# Altium PCB KeyboardMain.PcbDoc
Units mm, origin at the board's own origin, x right, y up, seen from the top; angles counter-clockwise.
Board outline 214 x 233 mm, 2 copper layers (Top Layer, Bottom Layer); 164 components, 120 nets, 562 pads, 51 vias.
Unrouted connection lines stored in the file: 1.
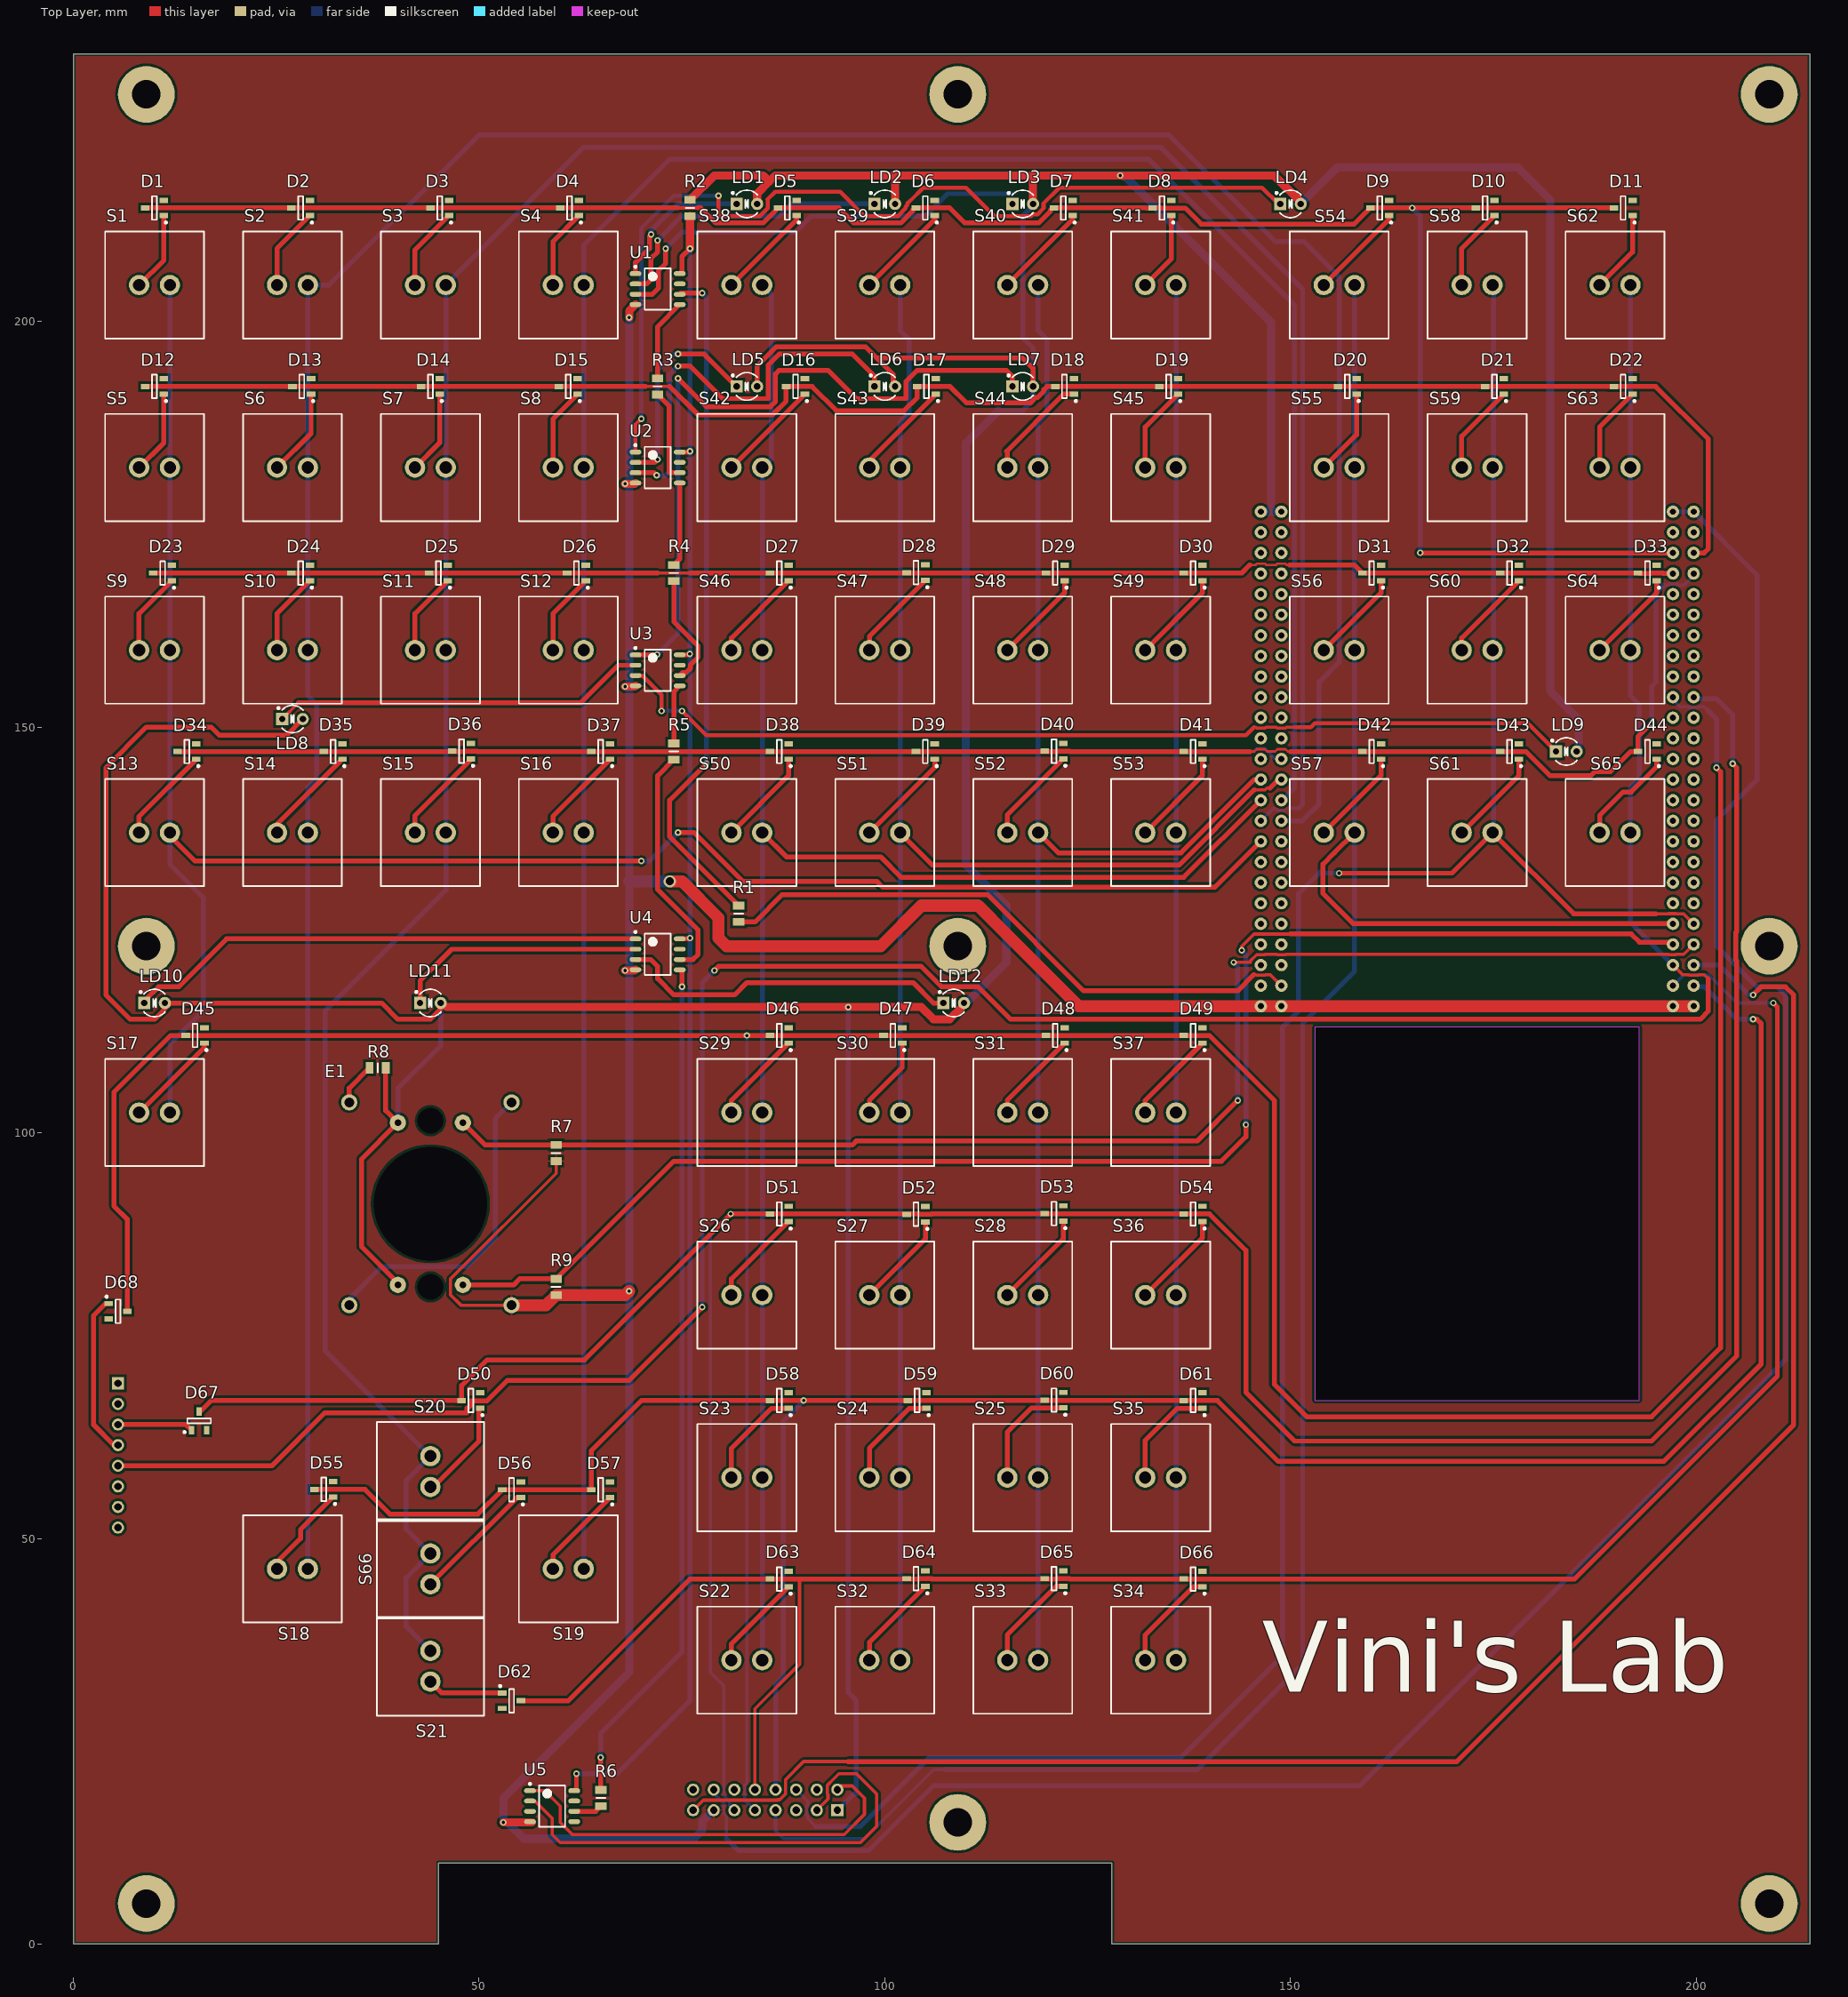
[diagram p0: Top Layer view]
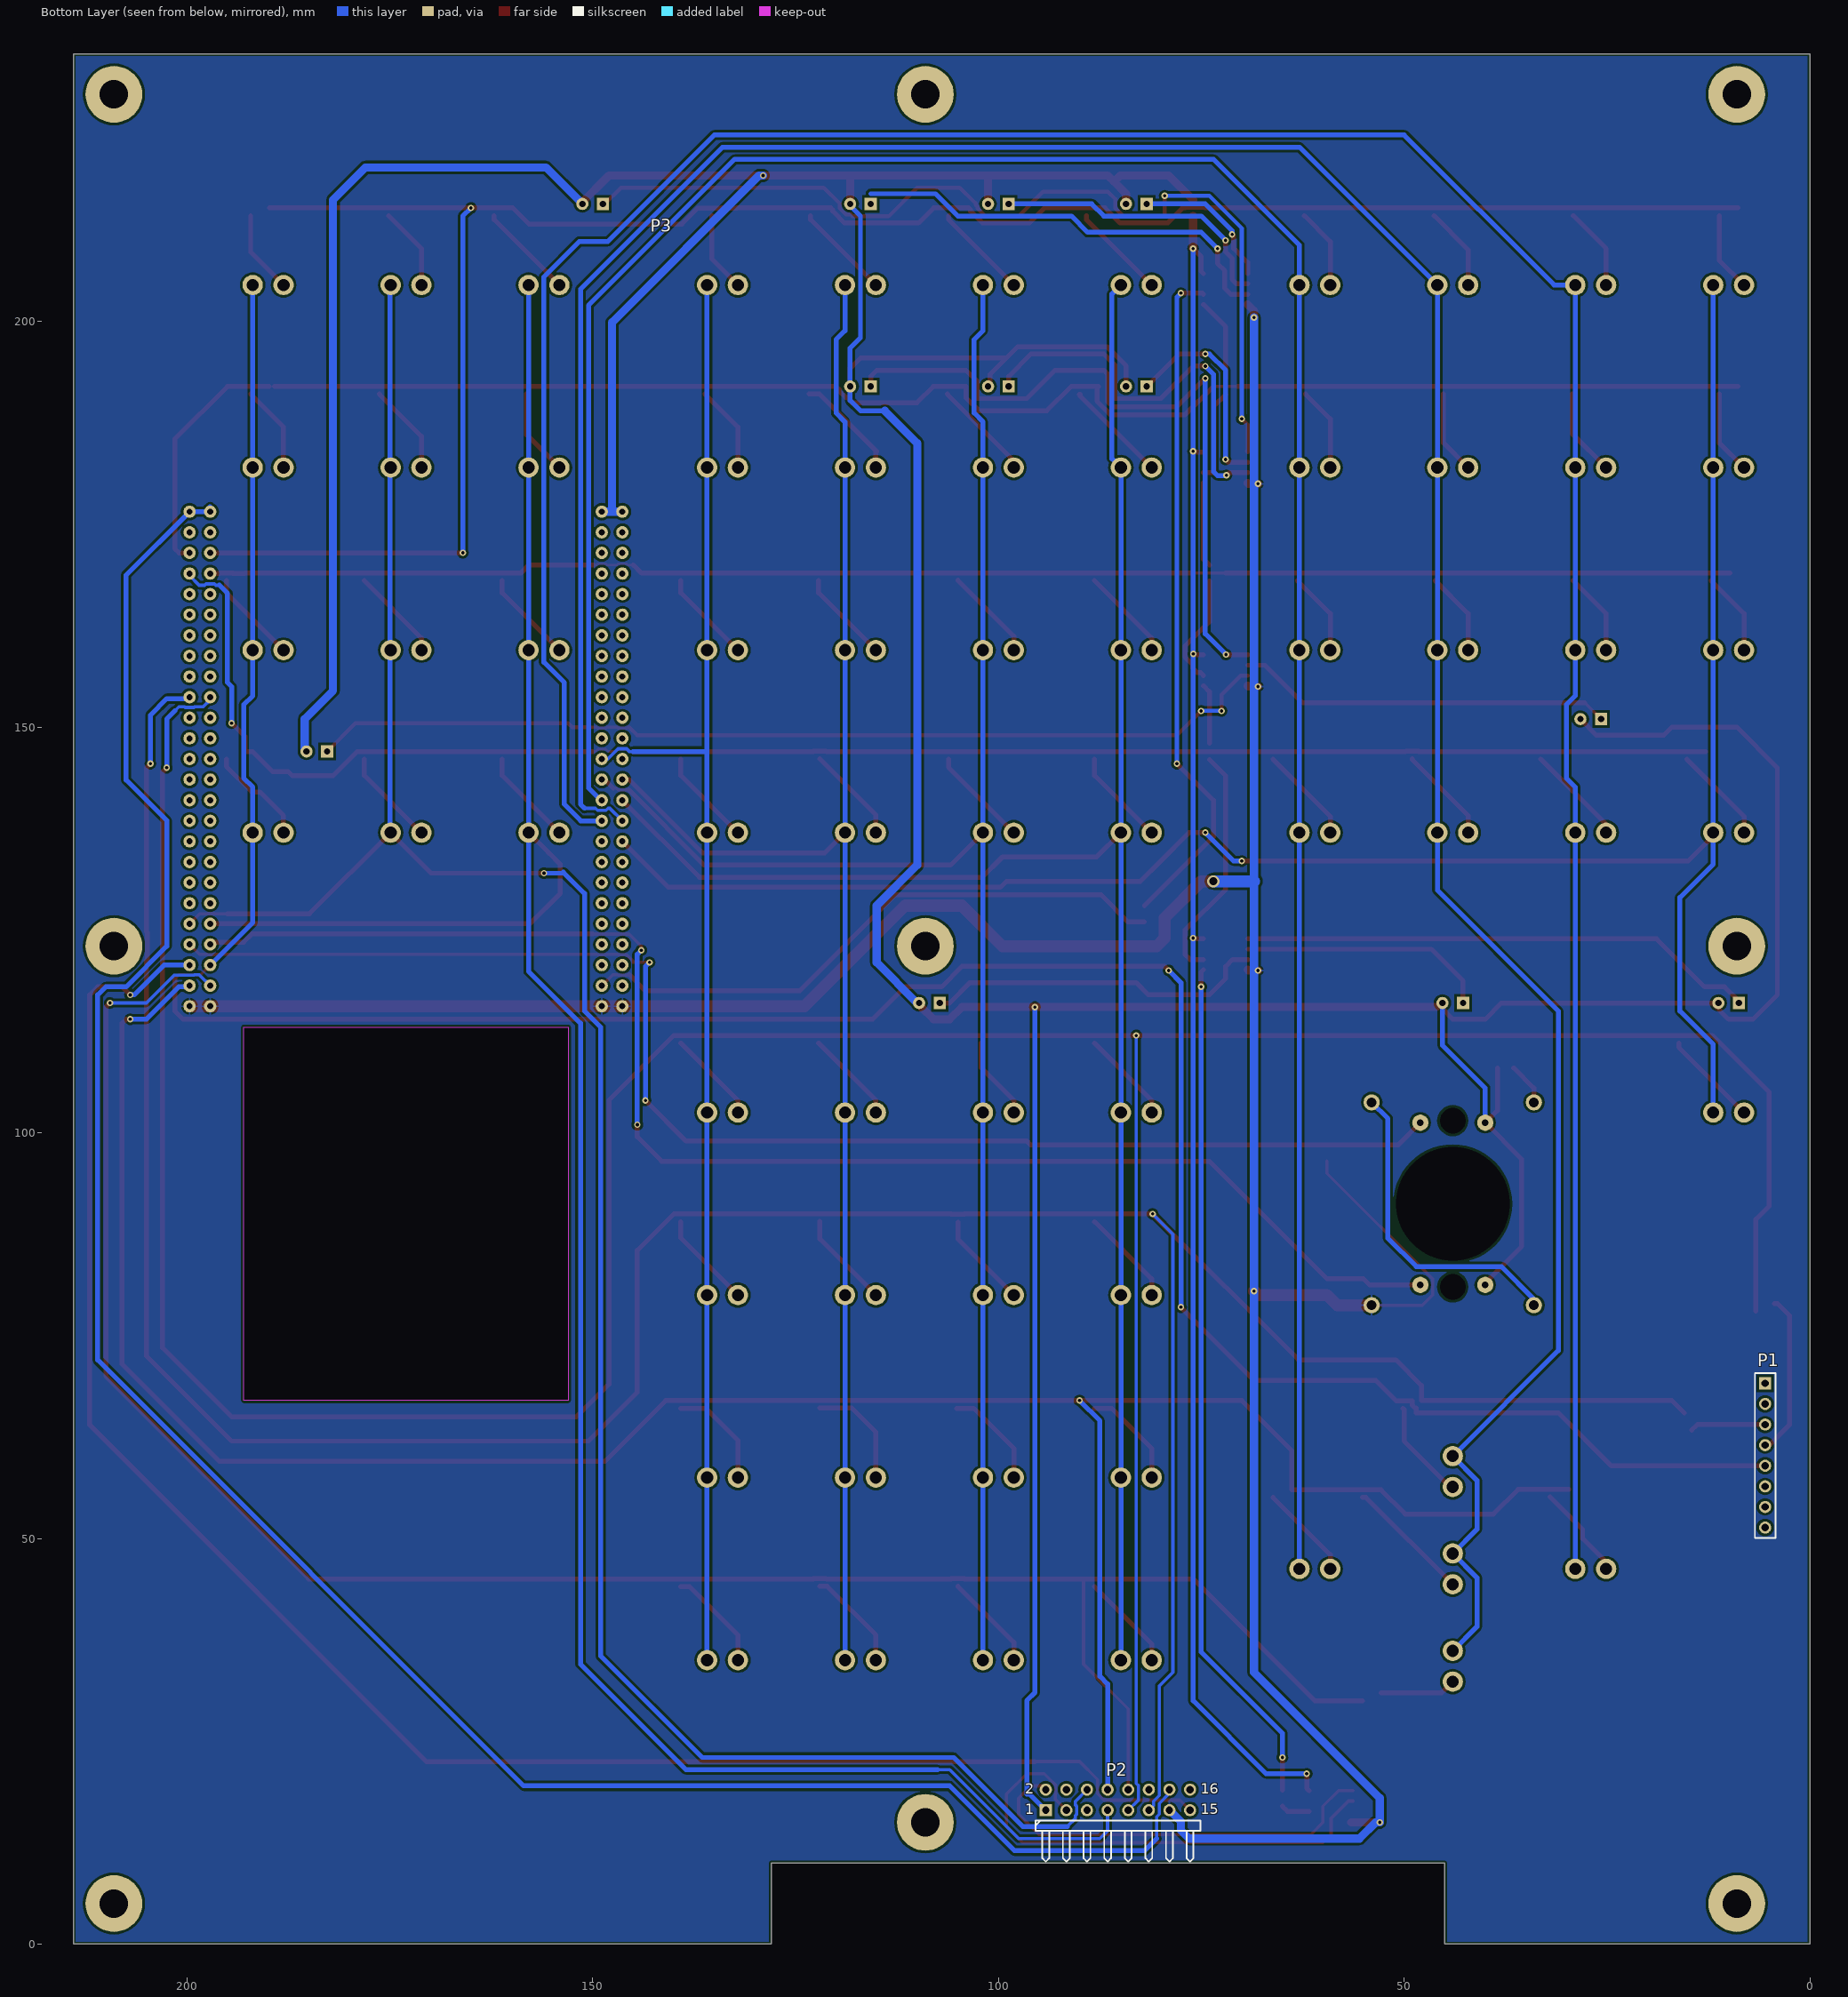
[diagram p1: Bottom Layer view, seen from below]
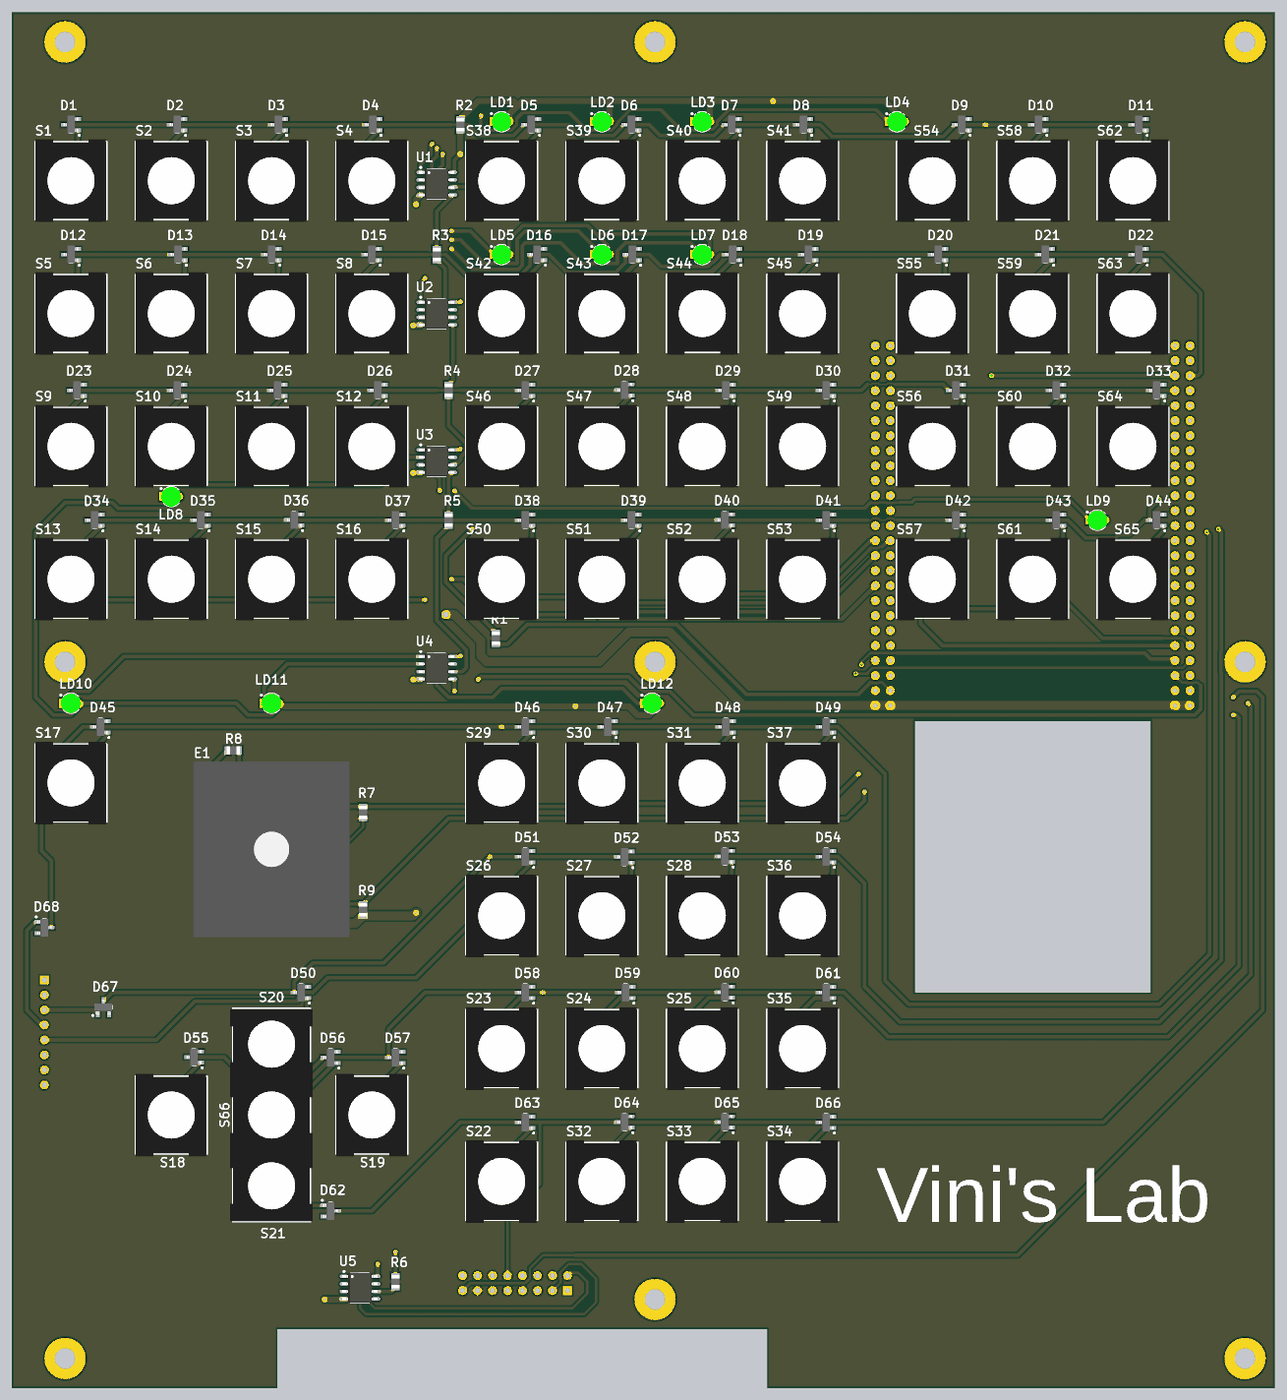
[diagram p2: 3D render of the assembled board from above, using the file's embedded part models]

## Layer stack, top to bottom
Top Solder: solder mask 0.0102, Solder Resist, Dk 3.5
Top Layer: signal copper 0.0356
Dielectric 1: dielectric 0.32, FR-4, Dk 4.8
Bottom Layer: signal copper 0.0356
Bottom Solder: solder mask 0.0102, Solder Resist, Dk 3.5

## Board outline
0,0 0,233 214,233 214,0 128,0 128,10 45,10 45,0
cut-out: 193,113 153,113 153,67 193,67

## Design rules (kind name [scope] priority, off if disabled: settings)
BoardOutlineClearance [All] p1: gap=0.3 ignorepadtopadclearanceinfootprint=FALSE
Clearance [All] p1: gap=0.3 ignorepadtopadclearanceinfootprint=FALSE
PolygonConnect [All] p1: connectstyle=Relief reliefconductorwidth=0.254 reliefentries=4 polygonreliefangle="90 Angle" airgapwidth=0.254
RoutingVias [All] p1: holewidth=0.7 width=1 viastyle="Through Hole" minholewidth=0.3 minwidth=0.6 maxholewidth=2 maxwidth=2
SolderMaskExpansion [All] p1: expansion=0.102 istentingtop=FALSE
Width [All] p1: maxlimit=4 minlimit=0.3 preferedwidth=0.4
30 further rules are at their usual default settings.

## Classes and differential pairs
component class KeyboardMainMCU: P3

## Components (designator, comment, footprint, x,y, rotation, side; value= is the part's Value field where it differs from the comment)
D1 "BAV199" SOT95P240X110-3N 10,214 r180 top
D2 "BAV199" SOT95P240X110-3N 28,214 r180 top
D3 "BAV199" SOT95P240X110-3N 45.15,214 r180 top
D4 "BAV199" SOT95P240X110-3N 61.15,214 r180 top
D5 "BAV199" SOT95P240X110-3N 88,214 r180 top
D6 "BAV199" SOT95P240X110-3N 105,214 r180 top
D7 "BAV199" SOT95P240X110-3N 122,214 r180 top
D8 "BAV199" SOT95P240X110-3N 134.15,214 r180 top
D9 "BAV199" SOT95P240X110-3N 161,214 r180 top
D10 "BAV199" SOT95P240X110-3N 174,214 r180 top
D11 "BAV199" SOT95P240X110-3N 191,214 r180 top
D12 "BAV199" SOT95P240X110-3N 10,192 r180 top
D13 "BAV199" SOT95P240X110-3N 28.15,192 r180 top
D14 "BAV199" SOT95P240X110-3N 44,192 r180 top
D15 "BAV199" SOT95P240X110-3N 61,192 r180 top
D16 "BAV199" SOT95P240X110-3N 89,192 r180 top
D17 "BAV199" SOT95P240X110-3N 105.15,192 r180 top
D18 "BAV199" SOT95P240X110-3N 122.15,192 r180 top
D19 "BAV199" SOT95P240X110-3N 135,192 r180 top
D20 "BAV199" SOT95P240X110-3N 157,192 r180 top
D21 "BAV199" SOT95P240X110-3N 175.15,192 r180 top
D22 "BAV199" SOT95P240X110-3N 191,192 r180 top
D23 "BAV199" SOT95P240X110-3N 11,169 r180 top
D24 "BAV199" SOT95P240X110-3N 28,169 r180 top
D25 "BAV199" SOT95P240X110-3N 45,169 r180 top
D26 "BAV199" SOT95P240X110-3N 62,169 r180 top
D27 "BAV199" SOT95P240X110-3N 87,169 r180 top
D28 "BAV199" SOT95P240X110-3N 103.85,169.05 r180 top
D29 "BAV199" SOT95P240X110-3N 121,169 r180 top
D30 "BAV199" SOT95P240X110-3N 138,169 r180 top
D31 "BAV199" SOT95P240X110-3N 160,169 r180 top
D32 "BAV199" SOT95P240X110-3N 177,169 r180 top
D33 "BAV199" SOT95P240X110-3N 194,169 r180 top
D34 "BAV199" SOT95P240X110-3N 14,147 r180 top
D35 "BAV199" SOT95P240X110-3N 32,147 r180 top
D36 "BAV199" SOT95P240X110-3N 47.85,147.05 r180 top
D37 "BAV199" SOT95P240X110-3N 65,147 r180 top
D38 "BAV199" SOT95P240X110-3N 87,147 r180 top
D39 "BAV199" SOT95P240X110-3N 105,147 r180 top
D40 "BAV199" SOT95P240X110-3N 120.85,147.05 r180 top
D41 "BAV199" SOT95P240X110-3N 138,147 r180 top
D42 "BAV199" SOT95P240X110-3N 160,147 r180 top
D43 "BAV199" SOT95P240X110-3N 177,147 r180 top
D44 "BAV199" SOT95P240X110-3N 194,147 r180 top
D45 "BAV199" SOT95P240X110-3N 15,112 r180 top
D46 "BAV199" SOT95P240X110-3N 87,112 r180 top
D47 "BAV199" SOT95P240X110-3N 101,112 r180 top
D48 "BAV199" SOT95P240X110-3N 121,112 r180 top
D49 "BAV199" SOT95P240X110-3N 138,112 r180 top
D50 "BAV199" SOT95P240X110-3N 49,67 r180 top
D51 "BAV199" SOT95P240X110-3N 87,90 r180 top
D52 "BAV199" SOT95P240X110-3N 103.85,89.95 r180 top
D53 "BAV199" SOT95P240X110-3N 120.85,90.05 r180 top
D54 "BAV199" SOT95P240X110-3N 138,90 r180 top
D55 "BAV199" SOT95P240X110-3N 30.85,56.05 r180 top
D56 "BAV199" SOT95P240X110-3N 54,56 r180 top
D57 "BAV199" SOT95P240X110-3N 65,56 r180 top
D58 "BAV199" SOT95P240X110-3N 87,67 r180 top
D59 "BAV199" SOT95P240X110-3N 104,67 r180 top
D60 "BAV199" SOT95P240X110-3N 120.85,67.05 r180 top
D61 "BAV199" SOT95P240X110-3N 138,67 r180 top
D62 "BAV199" SOT95P240X110-3N 54,30 r0 top
D63 "BAV199" SOT95P240X110-3N 87,45 r180 top
D64 "BAV199" SOT95P240X110-3N 103.85,45.05 r180 top
D65 "BAV199" SOT95P240X110-3N 120.85,45.05 r180 top
D66 "BAV199" SOT95P240X110-3N 138,45 r180 top
D67 "BAV199" SOT95P240X110-3N 15.5,64.5 r90 top
D68 "BAV199" SOT95P240X110-3N 5.5,78 r0 top
E1 "ENCODER" ENCODER 44,91.25 r0 top
LD1 "Green" LED_3MM_GREEN_1C-2A 83,214.5 r0 top
LD2 "Green" LED_3MM_GREEN_1C-2A 100,214.5 r0 top
LD3 "Green" LED_3MM_GREEN_1C-2A 117,214.5 r0 top
LD4 "Green" LED_3MM_GREEN_1C-2A 150,214.5 r0 top
LD5 "Green" LED_3MM_GREEN_1C-2A 83,192 r0 top
LD6 "Green" LED_3MM_GREEN_1C-2A 100,192 r0 top
LD7 "Green" LED_3MM_GREEN_1C-2A 117,192 r0 top
LD8 "Green" LED_3MM_GREEN_1C-2A 27,151 r0 top
LD9 "Green" LED_3MM_GREEN_1C-2A 184,147 r0 top
LD10 "Green" LED_3MM_GREEN_1C-2A 10,116 r0 top
LD11 "Green" LED_3MM_GREEN_1C-2A 44,116 r0 top
LD12 "Green" LED_3MM_GREEN_1C-2A 108.5,116 r0 top
P1 "Header 8" HDR1X8 5.5,69.12 r270 bottom
P2 "Header 8X2H" HDR2X8H 94.16,16.5 r180 bottom
P3 "STM32DISCOVERY" DISCO 206.3,113.06 r180 bottom locked
R1 "33" RESC2012X60N 82,127 r270 top
R2 "100k" RESC2012X60N 76,214 r90 top
R3 "33" RESC2012X60N 72,192 r90 top
R4 "33" RESC2012X60N 74,169 r90 top
R5 "33" RESC2012X60N 74,147 r90 top
R6 "33" RESC2012X60N 65,18 r90 top
R7 "22k" RESC2012X60N 59.5,97.5 r270 top
R8 "49R9" RESC2012X60N 37.5,108 r180 top
R9 "22k" RESC2012X60N 59.5,81 r90 top
S1 "SWITCH" SWITCH 10,204.5 r0 top
S2 "SWITCH" SWITCH 27,204.5 r0 top
S3 "SWITCH" SWITCH 44,204.5 r0 top
S4 "SWITCH" SWITCH 61,204.5 r0 top
S5 "SWITCH" SWITCH 10,182 r0 top
S6 "SWITCH" SWITCH 27,182 r0 top
S7 "SWITCH" SWITCH 44,182 r0 top
S8 "SWITCH" SWITCH 61,182 r0 top
S9 "SWITCH" SWITCH 10,159.5 r0 top
S10 "SWITCH" SWITCH 27,159.5 r0 top
S11 "SWITCH" SWITCH 44,159.5 r0 top
S12 "SWITCH" SWITCH 61,159.5 r0 top
S13 "SWITCH" SWITCH 10,137 r0 top
S14 "SWITCH" SWITCH 27,137 r0 top
S15 "SWITCH" SWITCH 44,137 r0 top
S16 "SWITCH" SWITCH 61,137 r0 top
S17 "SWITCH" SWITCH 10,102.5 r0 top
S18 "SWITCH" SWITCH 27,46.25 r0 top
S19 "SWITCH" SWITCH 61,46.25 r0 top
S20 "SWITCH" SWITCH 44,58.25 r90 top
S21 "SWITCH" SWITCH 44,34.25 r90 top
S22 "SWITCH" SWITCH 83,35 r0 top
S23 "SWITCH" SWITCH 83,57.5 r0 top
S24 "SWITCH" SWITCH 100,57.5 r0 top
S25 "SWITCH" SWITCH 117,57.5 r0 top
S26 "SWITCH" SWITCH 83,80 r0 top
S27 "SWITCH" SWITCH 100,80 r0 top
S28 "SWITCH" SWITCH 117,80 r0 top
S29 "SWITCH" SWITCH 83,102.5 r0 top
S30 "SWITCH" SWITCH 100,102.5 r0 top
S31 "SWITCH" SWITCH 117,102.5 r0 top
S32 "SWITCH" SWITCH 100,35 r0 top
S33 "SWITCH" SWITCH 117,35 r0 top
S34 "SWITCH" SWITCH 134,35 r0 top
S35 "SWITCH" SWITCH 134,57.5 r0 top
S36 "SWITCH" SWITCH 134,80 r0 top
S37 "SWITCH" SWITCH 134,102.5 r0 top
S38 "SWITCH" SWITCH 83,204.5 r0 top
S39 "SWITCH" SWITCH 100,204.5 r0 top
S40 "SWITCH" SWITCH 117,204.5 r0 top
S41 "SWITCH" SWITCH 134,204.5 r0 top
S42 "SWITCH" SWITCH 83,182 r0 top
S43 "SWITCH" SWITCH 100,182 r0 top
S44 "SWITCH" SWITCH 117,182 r0 top
S45 "SWITCH" SWITCH 134,182 r0 top
S46 "SWITCH" SWITCH 83,159.5 r0 top
S47 "SWITCH" SWITCH 100,159.5 r0 top
S48 "SWITCH" SWITCH 117,159.5 r0 top
S49 "SWITCH" SWITCH 134,159.5 r0 top
S50 "SWITCH" SWITCH 83,137 r0 top
S51 "SWITCH" SWITCH 100,137 r0 top
S52 "SWITCH" SWITCH 117,137 r0 top
S53 "SWITCH" SWITCH 134,137 r0 top
S54 "SWITCH" SWITCH 156,204.5 r0 top
S55 "SWITCH" SWITCH 156,182 r0 top
S56 "SWITCH" SWITCH 156,159.5 r0 top
S57 "SWITCH" SWITCH 156,137 r0 top
S58 "SWITCH" SWITCH 173,204.5 r0 top
S59 "SWITCH" SWITCH 173,182 r0 top
S60 "SWITCH" SWITCH 173,159.5 r0 top
S61 "SWITCH" SWITCH 173,137 r0 top
S62 "SWITCH" SWITCH 190,204.5 r0 top
S63 "SWITCH" SWITCH 190,182 r0 top
S64 "SWITCH" SWITCH 190,159.5 r0 top
S65 "SWITCH" SWITCH 190,137 r0 top
S66 "SWITCH" SWITCH 44,46.25 r90 top
U1 "WS2811" SOP-8 72,204 r0 top
U2 "WS2811" SOP-8 72,182 r0 top
U3 "WS2811" SOP-8 72,157 r0 top
U4 "WS2811" SOP-8 72,122 r0 top
U5 "WS2811" SOP-8 59,17 r0 top

## Footprints (in the part's own frame and the unit in brackets; to place one, negate y for a bottom-side part, rotate by r counter-clockwise, add the part's x,y. Pads: shape width x height; smd on the part's side, far side on the other; paste and mask are expansions set on the pad)
DISCO [mil]
  round 60 hole 30: 1(260.63,2500) 2(360.63,2500) 3(260.63,2400) 4(360.63,2400) 5(260.63,2300) 6(360.63,2300) 7(260.63,2200) 8(360.63,2200) 9(260.63,2100) 10(360.63,2100) 11(260.63,2000) 12(360.63,2000) 13(260.63,1900) 14(360.63,1900) 15(260.63,1800) 16(360.63,1800) 17(260.63,1700) 18(360.63,1700) 19(260.63,1600) 20(360.63,1600) 21(260.63,1500) 22(360.63,1500) 23(260.63,1400) 24(360.63,1400) 25(260.63,1300) 26(360.63,1300) 27(260.63,1200) 28(360.63,1200) 29(260.63,1100) 30(360.63,1100) 31(260.63,1000) 32(360.63,1000) 33(260.63,900) 34(360.63,900) 35(260.63,800) 36(360.63,800) 37(260.63,700) 38(360.63,700) 39(260.63,600) 40(360.63,600) 41(260.63,500) 42(360.63,500) 43(260.63,400) 44(360.63,400) 45(260.63,300) 46(360.63,300) 47(260.63,200) 48(360.63,200) 49(260.63,100) 50(360.63,100) 51(2260.63,2500) 52(2360.63,2500) 53(2260.63,2400) 54(2360.63,2400) 55(2260.63,2300) 56(2360.63,2300) 57(2260.63,2200) 58(2360.63,2200) 59(2260.63,2100) 60(2360.63,2100) 61(2260.63,2000) 62(2360.63,2000) 63(2260.63,1900) 64(2360.63,1900) 65(2260.63,1800) 66(2360.63,1800) 67(2260.63,1700) 68(2360.63,1700) 69(2260.63,1600) 70(2360.63,1600) 71(2260.63,1500) 72(2360.63,1500) 73(2260.63,1400) 74(2360.63,1400) 75(2260.63,1300) 76(2360.63,1300) 77(2260.63,1200) 78(2360.63,1200) 79(2260.63,1100) 80(2360.63,1100) 81(2260.63,1000) 82(2360.63,1000) 83(2260.63,900) 84(2360.63,900) 85(2260.63,800) 86(2360.63,800) 87(2260.63,700) 88(2360.63,700) 89(2260.63,600) 90(2360.63,600) 91(2260.63,500) 92(2360.63,500) 93(2260.63,400) 94(2360.63,400) 95(2260.63,300) 96(2360.63,300) 97(2260.63,200) 98(2360.63,200) 99(2260.63,100) 100(2360.63,100)
  body extent 8,10 2606,3829, height 134
ENCODER [mm]
  round 2 hole 1.2: 1(-10,12.5) 2(10,12.5) 3(-10,-12.5) 4(10,-12.5)
  round 2 hole 0.8: 5(-4,10) 6(4,10) 7(-4,-10) 8(4,-10)
  round 2 hole 3.2 unplated: ""(0,-10.25) ""(0,10.25)
  round 0 hole 14 unplated: ""(0,0)
  body extent -13.25,-14.85 13.25,14.85, height 29.5
HDR1X8 [mm] "Connector; Header; 8 Position"
  rect 1.5x1.5 hole 0.9: 1(0,0)
  round 1.5 hole 0.9: 2(2.54,0) 3(5.08,0) 4(7.62,0) 5(10.16,0) 6(12.7,0) 7(15.24,0) 8(17.78,0)
  silkscreen extent -1.27,-1.27 19.05,1.27
HDR2X8H [mm] "Connector; Header; 8x2 Position; Right Angle"
  rect 1.5x1.5 hole 0.9: 1(0,0)
  round 1.5 hole 0.9: 2(0,2.54) 3(2.54,0) 4(2.54,2.54) 5(5.08,0) 6(5.08,2.54) 7(7.62,0) 8(7.62,2.54) 9(10.16,0) 10(10.16,2.54) 11(12.7,0) 12(12.7,2.54) 13(15.24,0) 14(15.24,2.54) 15(17.78,0) 16(17.78,2.54)
  silkscreen extent -1.27,-6.35 19.05,-1.27
LED_3MM_GREEN_1C-2A [mm] "LED, Green, Body Dia. 3.43 mm, Pin spacing 2.54mm"
  rect 1.5x1.5 hole 0.8: 1(-1.27,0)
  round 1.5 hole 0.8: 2(1.27,0)
  silkscreen extent -1.85,-1.7 1.3,1.7, body extent -1.71,-1.71 1.72,1.72, height 9.85
RESC2012X60N [mm] "Chip Resistor, EIA 0805, Metric 2012, Body 2.0x1.2mm, IPC Medium Density"
  rect 0.95x1.4 smd: 1(-1,0) 2(1,0)
  silkscreen extent 0,-0.55 0,0.55, body extent -1.1,-0.67 1.1,0.68, height 0.6
SOP-8 [mm] "SOP, 8-Leads, Body 4.90x3.90mm, Pitch 1.27mm, IPC Medium Density"
  oval 1.45x0.6 smd: 1(-2.725,1.905) 2(-2.725,0.635) 3(-2.725,-0.635) 4(-2.725,-1.905) 5(2.725,-1.905) 6(2.725,-0.635) 7(2.725,0.635) 8(2.725,1.905)
  silkscreen extent -2.85,-2.55 1.6,2.88, body extent -3,-2.55 3,2.55, height 1.75
SOT95P240X110-3N [mm] "SOT23 3-Leads, Pitch 0.95mm, Body 1.3x2.9mm, IPC Medium Density"
  rect 1.05x0.65 smd: 1(-1.15,0.95) 2(-1.15,-0.95) 3(1.15,0)
  silkscreen extent -1.53,-1.45 0.3,1.92, body extent -1.25,-1.5 1.25,1.5, height 1.1
SWITCH [mm]
  round 2.5 hole 1.5: 1(-1.9,0) 2(1.9,0)
  silkscreen extent -6.1,-6.6 6.1,6.6, body extent -6,-7 6,7, height 19.5

## Part data
D1 D2 D3 D4 D5 D6 D7 D8 D9 D10 D11 D12 D13 D14 D15 D16 D17 D18 D19 D20 D21 D22 D23 D24 D25 D26 D27 D28 D29 D30 D31 D32 D33 D34 D35 D36 D37 D38 D39 D40 D41 D42 D43 D44 D45 D46 D47 D48 D49 D50 D51 D52 D53 D54 D55 D56 D57 D58 D59 D60 D61 D62 D63 D64 D65 D66 D67 D68: "Serial Diode", Case=SOT23-3, Manufacturer="NXP SEMICONDUCTORS", Power=250mW, Voltage=75V, Author="CERN DEM JMW", Bonding=No, Component Type=Standard, ComponentHeight=1.1mm, CreateDate=11/21/2008, Device=BAV199, HelpURL=\\cern.ch\dfs\Applications\Altium\Datasheets\BAV199.pdf, LatestRevisionDate=11/21/2008, Manufacturer Part Number=BAV199, Mounted=Yes, PackageDescription="SOT, 0.95mm Pitch; 3 Pin, 1.40mm W X 3.00mm L X 1.10mm H body, IPC Medium Density", Part Description="Low-Leakage Double Diode", Part Number=BAV199, Pin Count=3, PressFit=No, Sense=No, SMD=Yes, Socket=No
LD1 LD2 LD3 LD4 LD5 LD6 LD7 LD8 LD9 LD10 LD11 LD12: library part LED_AVAGO_HLMP-1790, "LED Green 1C 2A", Manufacturer="AVAGO TECHNOLOGIES", Manufacturer Part Number=HLMP-1790, Author="CERN DEM JLC", Bonding=No, Color=Green, Component Type=Standard, ComponentHeight=6.35mm(min), CreateDate=6/12/2008, HelpURL=\\cern.ch\dfs\Applications\Altium\Datasheets\LED_AVAGO_HLMP-1790.pdf, LatestRevisionDate=3/17/2010, Mounted=Yes, PackageDescription="LED, Green, Body Dia. 3.43 mm, Pin spacing 2.54mm", Part Description="3mm Green LED", Part Number=LED_AVAGO_HLMP-1790, Pin Count=2, PressFit=No, Sense=No, SMD=No, Socket=No
P1: "Header, 8-Pin", LatestRevisionDate=17-Jul-2002, LatestRevisionNote="Re-released for DXP Platform.", Publisher="Altium Limited"
P2: "Header, 8-Pin, Dual row, Right Angle", LatestRevisionDate=17-Jul-2002, LatestRevisionNote="Re-released for DXP Platform.", Publisher="Altium Limited"
R1 R3 R4 R5 R6: library part R0805_33R_1%_0.125W_100PPM, "Resistor - 1%", Case=0805, Manufacturer=GENERIC, Manufacturer1 ComponentHeight=0.6mm, Manufacturer1 Example="NIC COMPONENT", Manufacturer1 Part Number=NRC10F33R0TRF, Power=0.125W, Tolerance=±1%, Author="CERN DEM JLC", Component Type=Standard, CreateDate=12/3/2007, HelpURL=\\cern.ch\dfs\Applications\Altium\Datasheets\R0805_NIC_NRC.pdf, LatestRevisionDate=3/13/2008, Manufacturer Part Number=R0805_33R_1%_0.125W_100PPM, Mounted=Yes, Part Description="General Purpose Thick Film Chip Resistor", Part Number=R0805_33R_1%_0.125W_100PPM, Pin Count=2, PressFit=No, Sense=No, SMD=Yes, Socket=No, Status=Preferred, TC=±100ppm/°C
R2: library part R0805_100K_1%_0.125W_100PPM, "Resistor - 1%", Case=0805, Manufacturer=GENERIC, Manufacturer1 ComponentHeight=0.6mm, Manufacturer1 Example="NIC COMPONENT", Manufacturer1 Part Number=NRC10F1003TRF, Power=0.125W, Tolerance=±1%, Author="CERN DEM JLC", Component Type=Standard, CreateDate=12/3/2007, HelpURL=\\cern.ch\dfs\Applications\Altium\Datasheets\R0805_NIC_NRC.pdf, LatestRevisionDate=3/13/2008, Manufacturer Part Number=R0805_100K_1%_0.125W_100PPM, Mounted=Yes, Part Description="General Purpose Thick Film Chip Resistor", Part Number=R0805_100K_1%_0.125W_100PPM, Pin Count=2, PressFit=No, Sense=No, SMD=Yes, Socket=No, Status=Preferred, TC=±100ppm/°C
R7 R9: library part R0805_22K_1%_0.125W_100PPM, "Resistor - 1%", Case=0805, Manufacturer=GENERIC, Manufacturer1 ComponentHeight=0.6mm, Manufacturer1 Example="NIC COMPONENT", Manufacturer1 Part Number=NRC10F2202TRF, Power=0.125W, Tolerance=±1%, Author="CERN DEM JLC", Component Type=Standard, CreateDate=12/3/2007, HelpURL=\\cern.ch\dfs\Applications\Altium\Datasheets\R0805_NIC_NRC.pdf, LatestRevisionDate=3/13/2008, Manufacturer Part Number=R0805_22K_1%_0.125W_100PPM, Mounted=Yes, Part Description="General Purpose Thick Film Chip Resistor", Part Number=R0805_22K_1%_0.125W_100PPM, Pin Count=2, PressFit=No, Sense=No, SMD=Yes, Socket=No, Status=Preferred, TC=±100ppm/°C
R8: library part R0805_49R9_0.1%_0.125W_25PPM, "Resistor - 0.1%", Case=0805, Manufacturer=GENERIC, Manufacturer1 ComponentHeight=0.6mm, Manufacturer1 Example=PANASONIC, Manufacturer1 Part Number=ERA6AEB49R9V, Power=0.125W, Tolerance=±0.1%, Author="CERN DEM JLC", Component Type=Standard, CreateDate=6/20/2011, HelpURL=\\cern.ch\dfs\Applications\Altium\Datasheets\R0805_PANASONIC_ERA.pdf, LatestRevisionDate=6/20/2011, Manufacturer Part Number=R0805_49R9_0.1%_0.125W_25PPM, Mounted=Yes, Part Description="Thin Film Chip Resistor", Part Number=R0805_49R9_0.1%_0.125W_25PPM, Pin Count=2, PressFit=No, Sense=No, SMD=Yes, Socket=No, Status="Not Recommended", TC=±25ppm
U1 U2 U3 U4 U5: Supplier Part Number 1=1378, Supplier 1="Arrow Electronics"

## Free pads (board coordinates)
  round 7 hole 3.5: ""(9,5) ""(9,123) ""(9,228) ""(109,15) ""(109,123) ""(109,228) ""(209,5) ""(209,123) ""(209,228)

## Via types
v1: diameter 0.8, hole 0.4, Top Layer to Bottom Layer, 50 vias
v2: diameter 1.5, hole 1, Top Layer to Bottom Layer, 1 vias

## Nets (pads, with @x,y where several pads share a name; then routed paths per layer and width w, separated by ;. In a path a pad name is that pad's centre, name@x,y a point inside that pad or via, vN(x,y) a via of type N, cw(c..) or ccw(c..) an arc to the next point about the centre after c; other vN are vias at no path point)
5V: E1.5 E1.7 LD1.2 LD2.2 LD3.2 LD4.2 LD5.2 LD6.2 LD7.2 LD8.2 LD9.2 LD10.2 LD11.2 LD12.2 P2.1 P3.51 P3.52 R2.2 R8.1 | length 713.9
  Top Layer w0.6: LD8.2@28.274,151.004 LD8.2 26.27,149 18,149 17,150 9,150 4,145 4,117 7,114 10,114 12,116 38,116 40,114 44,114 45.27,115.27 LD11.2 ; R8.1 38.5,102.75 E1.5 35.5,96.75 35.5,86 40,81.5 E1.7 ; LD5.2 84.27,194.543 86.627,196.9 97.62,196.9 99.01,195.51 ; LD6.2 101.01,192.26 101.01,193.51 99.01,195.51 ; LD7.2 118.27,194.23 116.99,195.51 99.01,195.51
  Top Layer w1: 46,115.5 v1(95.5,115.5) 104.5,115.5 106,114 108,114 LD12.2@109.5,115.5 ; R2.2 79,218 85,218 85.76,217.24 ; LD1.2 84.27,215.75 85.76,217.24 ; LD2.2 101.27,218 ; LD3.2 118.27,218 ; v1@129.285,217.95 v1@129.235,218 ; LD4.2@151.5,214.5 148,218 v1@129.235,218 ; 85.76,217.24 86.52,218 101.27,218 ; 101.27,218 118.27,218 ; 118.27,218 v1(129,218) ; v1(129,218) v1@129.235,218 ; v1(129,218) v1@129.235,218
  Bottom Layer w0.6: E1.5 40,105.5 45.27,110.77 LD11.2 ; P2.1 96.16,18.5 96.5,18.5 96.5,30 95.5,31 v1(95.5,115.5) ; 114,189 117,189 118.27,190.27 LD7.2 118.27,196.73 117,198 117,213 LD3.2@118.5,214.5
  Bottom Layer w1: LD12.2@110,116 115,121 115,128 110,133 110,185 114,189 ; v1(129,218) 129.5,218 147.61,199.89 147.61,176.56 ; P3.52 147.61,176.56 ; P3.51 147.61,176.56 ; LD4.2 155.77,219 178,219 182,215 182,154.5 185.5,151 185.5,147.23 LD9.2
COL0: P3.84 S1.2 S5.2 S9.2 S13.2 S17.2 | length 248.1
  Top Layer w0.6: S13.2 11.9,136.6 15,133.5 v1(70,133.5) ; v1(74.5,137) 76.5,137 80,133.5 82.5,131 99,131 99.75,130.25 140.67,130.25 P3.84
  Bottom Layer w0.6: S17.2 11.9,110.9 16,115 16,129 11.9,133.1 S1.2 ; v1(70,133.5) 71,133.5 v1(74.5,137)
COL1: P3.81 S2.2 S6.2 S10.2 S14.2 S18.2 | length 372.7
  Bottom Layer w0.6: S18.2 S14.2 28.9,142.625 30,143.725 30,152.775 28.9,153.875 S10.2 S6.2 S2.2 31.5,204.5 50,223 135,223 148.125,209.875 151.625,209.875 156,205.5 156,158 153.5,155.5 153.5,140.5 151.46,138.46 P3.81
COL2: P3.82 S3.2 S7.2 S11.2 S15.2 S20.2 S21.2 S66.2 | length 374.5
  Bottom Layer w0.4: P3.82 147.88,140 148.095,140 148.357,139.738 149.403,139.738 149.665,140 151,140
  Bottom Layer w0.6: S21.2 41,39.15 41,45.15 S66.2 41,51.15 41,57.15 S20.2 31,73.15 31,115 45.9,129.9 S15.2 S11.2 S7.2 S3.2 62.9,221.5 134,221.5 151.5,204 151.5,140.5 151,140
COL3: P3.79 S4.2 S8.2 S12.2 S16.2 S19.2 | length 324.3
  Bottom Layer w0.6: S19.2 S16.2 S12.2 S8.2 S4.2 62.9,209.4 73.5,220 132.5,220 150.5,202 150.5,142.5 149,141 P3.79
COL4: P3.80 S22.2 S23.2 S26.2 S29.2 S38.2 S42.2 S46.2 S50.2 | length 238.1
  Top Layer w0.6: S50.2 87.9,134 99.5,134 102,131.5 136.84,131.5 P3.80
  Bottom Layer w0.6: S22.2 S23.2 S26.2 S29.2 S50.2 S46.2 S42.2 86,183.1 86,203.4 S38.2
COL5: P3.77 S24.2 S27.2 S30.2 S32.2 S39.2 S43.2 S47.2 S51.2 | length 223.4
  Top Layer w0.4: 145.551,142.278 146.863,142.278 147.085,142.5 147.5,142.5
  Top Layer w0.6: S51.2 105.9,133 136.273,133 145.551,142.278 ; 147.5,142.5 148.54,143.54 P3.77
  Bottom Layer w0.6: S32.2 S24.2 S27.2 S30.2 S51.2 S47.2 S43.2 101.9,187.625 103,188.725 103,197.775 101.9,198.875 S39.2
COL6: P3.78 S25.2 S28.2 S31.2 S33.2 S40.2 S44.2 S48.2 S52.2 | length 202.6
  Top Layer w0.6: S52.2 121.4,134.5 136.5,134.5 145.54,143.54 P3.78
  Bottom Layer w0.6: S33.2 S25.2 S28.2 S31.2 S52.2 S48.2 S44.2 118.9,187.625 120,188.725 120,197.775 118.9,198.875 S40.2
COL7: P3.75 S34.2 S35.2 S36.2 S37.2 S41.2 S45.2 S49.2 S53.2 | length 183.1
  Bottom Layer w0.4: 145,147 145.475,147 145.817,147.342 146.863,147.342 147.205,147 148.125,146.08 P3.75
  Bottom Layer w0.6: S34.2 S35.2 S36.2 S37.2 S53.2 135.9,147 ; S41.2 S45.2 S49.2 135.9,147 ; 145,147 135.9,147
COL8: P2.7 P3.42 S54.2 S55.2 S56.2 S57.2 | length 303.3
  Top Layer w0.6: S57.2 155.4,134.5 154,133.1 154,129.5 157.74,125.76 P3.42
  Bottom Layer w0.4: P2.7 86.54,13.96 87.5,13 97.5,13 106,21.5 107.5,21.5
  Bottom Layer w0.6: 107.5,21.5 138.5,21.5 151.5,34.5 151.5,113.5 157.9,119.9 S57.2 S56.2 S55.2 S54.2
COL9: P2.6 P3.41 S58.2 S59.2 S60.2 S61.2 | length 290.8
  Top Layer w0.4: 195,127 196.595,127 196.617,127.022 197.5,127.022 197.5,127 198.44,127 P3.41
  Top Layer w0.6: v1(156,132) 169.9,132 S61.2 184.9,127 195,127
  Bottom Layer w0.4: P2.6 90.5,17.62 90.5,17.148 90.37,17.018 90.37,15.982 90.5,15.852 90.5,15.5 91.5,14.5
  Bottom Layer w0.6: 91.5,14.5 97,14.5 105.5,23 136.5,23 149,35.5 149,113 151,115 151,129.5 153.625,132.125 153.75,132 v1(156,132) ; S61.2 175,137.1 175,204.4 S58.2
COL10: P1.5 P3.46 S62.2 S63.2 S64.2 S65.2 | length 344.7
  Top Layer w0.4: P3.46 198.32,119.5 199.075,119.5 199.157,119.418 200.203,119.418 200.285,119.5 201,119.5 201.5,119
  Top Layer w0.6: P1.5 24.46,58.96 31,65.5 48.5,65.5 48.5,66.075 48.624,66.075 48.975,66.426 48.975,66.975 50.924,66.975 50.949,66.949 53.5,69.5 68.5,69.5 v1(77.5,78.5) ; v1(79,120) 79.5,120.5 104.5,120.5 107,118 111.5,118 115.5,114 200.5,114 201.5,115 201.5,119
  Bottom Layer w0.6: v1(77.5,78.5) 77.5,118.5 v1(79,120) ; S62.2 S63.2 S64.2 191.9,153.875 193,152.775 193,143.725 191.9,142.625 S65.2 191.9,125.92 P3.46
ENC_A: E1.8 P3.44 R9.2 | length 182.1
  Top Layer w0.4: v1(144,122.5) 144,123 145.5,124.5 145.815,124.5 145.817,124.498 146.863,124.498 146.865,124.5 148.355,124.5 148.357,124.498 149.403,124.498 149.405,124.5 150,124.5
  Top Layer w0.6: E1.8 54.25,81.25 55,82 R9.2 74,96.5 141.5,96.5 144.5,99.5 v1(144.5,101) ; 150,124.5 192,124.5 193,123.5 196.86,123.5 P3.44
  Bottom Layer w0.6: v1(144,122.5) 144.5,122 v1(144.5,101)
ENC_B: E1.6 P3.43 R7.1 | length 173.9
  Top Layer w0.4: v1(143,121) 145.042,121 145.078,121.036 145.078,121.203 145.817,121.942 145.984,121.942 146,121.958 146.863,121.958 146.905,122 148.315,122 148.357,121.958 149.403,121.958 149.445,122 196.575,122 196.617,121.958 197.5,121.958 197.5,122 198.46,122 P3.43
  Top Layer w0.6: E1.6 50.75,98.5 R7.1 96,98.5 96.5,99 138.5,99 v1(143.5,104)
  Bottom Layer w0.6: v1(143,121) 143.5,120.5 v1(143.5,104)
GND: E1.4 P2.13 P3.49 P3.50 P3.99 P3.100 R7.2 R9.1 U1.4 U2.4 U3.4 U4.4 U5.4 | length 418.4
  Top Layer w0.4: E1.4 47.75,78.75 46.485,80.015 46.485,81.985 59.5,95 R7.2
  Top Layer w1: v1(53,15) U5.4@56.5,15 ; v1(68,120) 69.18,120 U4.4 ; v1(68,155) 69.18,155 U3.4 ; v1(68,180) 69.18,180 U2.4 ; v1(68.5,200.5) 68.5,201.32 U1.4
  Top Layer w1.5: E1.4 58.25,78.75 R9.1 68,80 v1(68.5,80.5) ; v2(73.5,131) 75,131 79.5,126.5 79.5,124 80.5,123 99.5,123 104.5,128 111.5,128 115,124.5 123.9,115.6 P3.100 P3.99 P3.50 P3.49
  Bottom Layer w1: v1(68.5,200.5) 68.5,155 68.5,131 v1(68.5,80.5) 68.5,33.5 53,18 v1(53,15) 53.5,15 55.5,13 76.5,13 77.5,14 77.5,15.08 P2.13
  Bottom Layer w1.5: 68.5,131 v2(73.5,131)
LED13: P2.2 U5.1 | length 51.8
  Top Layer w0.4: U5.1 58.095,18.905 60,17 60,15 61.5,13.5 95,13.5 97.5,16 97.5,18 96,19.5 94.62,19.5 P2.2
LED14: P2.3 U5.2 | length 62.2
  Top Layer w0.4: U5.2 56.865,17.635 59,15.5 59,13.5 60,12.5 97,12.5 99,14.5 99,18.5 96.5,21 94.352,21 93.642,20.29 93,19.648 92.91,19.558 92.91,18.522 93,18.432 93,17.88 P2.3
LEDDATA: P3.97 R1.2 | length 74.6
  Top Layer w0.4: 145.5,119.5 145.735,119.5 145.817,119.418 146.863,119.418 146.945,119.5 147.5,119.5 148.86,118.14 P3.97
  Top Layer w0.6: R1.2 84,126 87.35,129.35 112.65,129.35 124.5,117.5 143.5,117.5 145.5,119.5
LOCK: P2.15 P3.45 | length 224
  Top Layer w0.4: P2.15 77.38,17.5 77.63,17.75 79.438,17.75 80.942,17.75 81.978,17.75 83.482,17.75 84.518,17.75 86.022,17.75 86.75,17.75 86.79,17.79 87.058,17.79 87.79,18.522 87.79,20.29 90,22.5 95.5,22.5
  Top Layer w0.6: 95.5,22.5 170.5,22.5 212,64 212,117 211,118 208,118 v1(207,117)
  Bottom Layer w0.6: P3.45 202.82,120.68 206.5,117 v1(207,117)
NetD1_1: D1.1 S1.1 | length 9.8
  Top Layer w0.6: S1.1 11.15,207.55 D1.1
NetD2_1: D2.1 S2.1 | length 10.2
  Top Layer w0.6: S2.1 25.1,209 D2.1
NetD3_1: D3.1 S3.1 | length 10.3
  Top Layer w0.6: S3.1 42.1,208.85 D3.1
NetD4_1: D4.1 S4.1 | length 9.9
  Top Layer w0.6: S4.1 59.1,209.85 D4.1
NetD5_1: D5.1 S38.1 | length 11.9
  Top Layer w0.6: S38.1 89.15,212.55 D5.1
NetD6_1: D6.1 S39.1 | length 11.9
  Top Layer w0.6: S39.1 106.15,212.55 D6.1
NetD7_1: D7.1 S40.1 | length 11.9
  Top Layer w0.6: S40.1 123.15,212.55 D7.1
NetD8_1: D8.1 S41.1 | length 9.9
  Top Layer w0.6: S41.1 135.3,207.7 D8.1
NetD9_1: D9.1 S54.1 | length 11.9
  Top Layer w0.6: S54.1 162.15,212.55 D9.1
NetD10_1: D10.1 S58.1 | length 10.2
  Top Layer w0.6: S58.1 171.1,209 D10.1
NetD11_1: D11.1 S62.1 | length 10.2
  Top Layer w0.6: S62.1 192.15,208.55 D11.1
NetD12_1: D12.1 S5.1 | length 10.3
  Top Layer w0.6: S5.1 11.15,185.05 D12.1
NetD13_1: D13.1 S6.1 | length 10.8
  Top Layer w0.6: S6.1 29.3,186.2 D13.1
NetD14_1: D14.1 S7.1 | length 10.3
  Top Layer w0.6: S7.1 45.15,185.05 D14.1
NetD15_1: D15.1 S8.1 | length 10.3
  Top Layer w0.6: S8.1 59.1,188 D15.1
NetD16_1: D16.1 S42.1 | length 12.8
  Top Layer w0.6: S42.1 89.925,190.825 89.925,191.025 D16.1@90,191.025
NetD17_1: D17.1 S43.1 | length 12.4
  Top Layer w0.6: S43.1 98.1,182.85 D17.1
NetD18_1: D18.1 S44.1 | length 13.3
  Top Layer w0.6: S44.1 115.1,183.9 115,184 122.05,191.05 D18.1
NetD19_1: D19.1 S45.1 | length 10.7
  Top Layer w0.6: S45.1 132.1,187 D19.1
NetD20_1: D20.1 S55.1 | length 10.7
  Top Layer w0.6: S55.1 158.15,186.05 D20.1
NetD21_1: D21.1 S59.1 | length 11.2
  Top Layer w0.6: S59.1 171.1,185.85 D21.1
NetD22_1: D22.1 S63.1 | length 10.7
  Top Layer w0.6: S63.1 188.1,187 D22.1
NetD23_1: D23.1 S9.1 | length 10.2
  Top Layer w0.6: S9.1 8.1,164 D23.1
NetD24_1: D24.1 S10.1 | length 10.2
  Top Layer w0.6: S10.1 25.1,164 D24.1
NetD25_1: D25.1 S11.1 | length 10.2
  Top Layer w0.6: S11.1 42.1,164 D25.1
NetD26_1: D26.1 S12.1 | length 10.2
  Top Layer w0.6: S12.1 59.1,164 D26.1
NetD27_1: D27.1 S46.1 | length 11.5
  Top Layer w0.6: S46.1 81.1,161 D27.1
NetD28_1: D28.1 S47.1 | length 11.5
  Top Layer w0.6: S47.1 98.1,161.2 D28.1
NetD29_1: D29.1 S48.1 | length 11.5
  Top Layer w0.6: S48.1 122.15,166.55 D29.1
NetD30_1: D30.1 S49.1 | length 11.5
  Top Layer w0.6: S49.1 139.15,166.55 D30.1
NetD31_1: D31.1 S56.1 | length 11.5
  Top Layer w0.6: S56.1 161.15,166.55 D31.1
NetD32_1: D32.1 S60.1 | length 11.5
  Top Layer w0.6: S60.1 171.1,161 D32.1
NetD33_1: D33.1 S64.1 | length 11.5
  Top Layer w0.6: S64.1 195.15,166.55 D33.1
NetD34_1: D34.1 S13.1 | length 12
  Top Layer w0.6: S13.1 8.1,139 D34.1
NetD35_1: D35.1 S14.1 | length 12.4
  Top Layer w0.6: S14.1 25.1,138 D35.1
NetD36_1: D36.1 S15.1 | length 12
  Top Layer w0.6: S15.1 42.1,139.1 49,146 D36.1
NetD37_1: D37.1 S16.1 | length 12
  Top Layer w0.6: S16.1 59.1,139 D37.1
NetD38_1: D38.1 S50.1 | length 12
  Top Layer w0.6: S50.1 88.15,144.05 D38.1
NetD39_1: D39.1 S51.1 | length 12.4
  Top Layer w0.6: S51.1 106.15,145.05 D39.1
NetD40_1: D40.1 S52.1 | length 12
  Top Layer w0.6: S52.1 115.1,139.2 D40.1
NetD41_1: D41.1 S53.1 | length 12
  Top Layer w0.6: S53.1 139.15,144.05 D41.1
NetD42_1: D42.1 S57.1 | length 12
  Top Layer w0.6: S57.1 161.15,144.05 D42.1
NetD43_1: D43.1 S61.1 | length 12
  Top Layer w0.6: S61.1 178.15,144.05 D43.1
NetD44_1: D44.1 S65.1 | length 12.6
  Top Layer w0.6: S65.1 188.1,139.1 191,142 192,142 195.15,145.15 D44.1
NetD45_1: D45.1 S17.1 | length 11.9
  Top Layer w0.6: S17.1 16.15,110.55 D45.1
NetD46_1: D46.1 S29.1 | length 11.5
  Top Layer w0.6: S29.1 81.1,104 D46.1
NetD47_1: D47.1 S30.1 | length 10.2
  Top Layer w0.6: S30.1 98.1,104 102.15,108.05 D47.1
NetD48_1: D48.1 S31.1 | length 11.5
  Top Layer w0.6: S31.1 115.1,104 D48.1
NetD49_1: D49.1 S37.1 | length 11.5
  Top Layer w0.6: S37.1 132.1,104 D49.1
NetD50_1: D50.1 S20.1 | length 12.5
  Top Layer w0.6: S20.1 44.35,56.35 50,62 50,65.9 D50.1
NetD51_1: D51.1 S26.1 | length 12
  Top Layer w0.6: S26.1 81.1,82 D51.1
NetD52_1: D52.1 S27.1 | length 11.9
  Top Layer w0.6: S27.1 105,86.9 D52.1
NetD53_1: D53.1 S28.1 | length 12
  Top Layer w0.6: S28.1 122,86.9 D53.1
NetD54_1: D54.1 S36.1 | length 12
  Top Layer w0.6: S36.1 139.15,87.05 D54.1
NetD55_1: D55.1 S18.1 | length 11.7
  Top Layer w0.6: S18.1 25.1,47.1 28,50 28,51.1 D55.1
NetD56_1: D56.1 S66.1 | length 15.6
  Top Layer w0.6: S66.1 54.7,55.05 D56.1
NetD57_1: D57.1 S19.1 | length 11.7
  Top Layer w0.6: S19.1 59.1,48 D57.1
NetD58_1: D58.1 S23.1 | length 12.7
  Top Layer w0.6: S23.1 81.1,61.1 86.05,66.05 D58.1
NetD59_1: D59.1 S24.1 | length 12.7
  Top Layer w0.6: S24.1 98.1,61.1 103.05,66.05 D59.1
NetD60_1: D60.1 S25.1 | length 13.7
  Top Layer w0.6: S25.1 115.1,63.1 118.1,66.1 D60.1
NetD61_1: D61.1 S35.1 | length 13.3
  Top Layer w0.6: S35.1 132.1,62.1 136.05,66.05 D61.1
NetD62_1: D62.1 S21.1 | length 9.4
  Top Layer w0.6: S21.1 45.4,30.95 D62.1
NetD63_1: D63.1 S22.1 | length 12
  Top Layer w0.6: S22.1 81.1,37 D63.1
NetD64_1: D64.1 S32.1 | length 12
  Top Layer w0.6: S32.1 98.1,37.2 D64.1
NetD65_1: D65.1 S33.1 | length 12.5
  Top Layer w0.6: S33.1 115.1,38.1 121.1,44.1 D65.1
NetD66_1: D66.1 S34.1 | length 12.6
  Top Layer w0.6: S34.1 132.1,38.1 138.05,44.05 D66.1
NetD67_1: D67.1 P1.3 | length 9.3
  Top Layer w0.6: P1.3 13.86,64.04 D67.1
NetD68_1: D68.1 P1.4 | length 20
  Top Layer w0.6: D68.1 3.95,78.95 2.5,77.5 2.5,64 5,61.5 P1.4
NetE1_1: E1.1 R8.2 | length 5.3
  Top Layer w0.6: E1.1 34,105.5 R8.2
NetE1_2: E1.2 E1.3 | length 39.4
  Bottom Layer w0.6: E1.3 34,79.5 38,83.5 48.5,83.5 52,87 52,101.75 E1.2
NetLD1_1: LD1.1 U1.1 | length 17.4
  Top Layer w0.6: U1.1 69.275,207.275 71,209 71,210.501 71.2,210.701 v1(71.2,210.755)
  Bottom Layer w0.6: v1(71.2,210.755) 71.2,211.2 74.5,214.5 LD1.1@81.12,214.5
NetLD2_1: LD2.1 U1.2 | length 35.9
  Top Layer w0.6: U1.2 70.635,204.635 71.2,205.2 71.2,207.786 72,208.586 v1(72,210)
  Bottom Layer w0.6: v1(72,210) 75,213 87,213 88.5,214.5 LD2.1
NetLD3_1: LD3.1 U1.3 | length 53.9
  Top Layer w0.6: U1.3 71.365,203.365 72.1,204.1 72.1,206.251 73,207.151 v1(73,209)
  Bottom Layer w0.6: v1(73,209) 75,211 89,211 91,213 105,213 107.75,215.75 115.73,215.75
NetLD4_1: LD4.1 U2.1 | length 119.6
  Top Layer w0.5: U2.1@69.37,184 U2.1 69.275,187.275 v1(70,188) ; v1(79.5,215.5) 79.5,213 84.608,213 85.57,213.962 85.57,215.038 85.554,215.054 86.5,216 94.5,216 97.5,213 101.608,213 102.57,213.962 102.57,214.155 102.775,214.36 102.775,214.553 103.097,214.875 103.13,214.875 104.755,216.5 110,216.5 113.5,213 118,213 118.2,213.2 118.808,213.2 119.57,213.962 119.57,214.57 121.5,216.5 146.5,216.5 LD4.1@148.5,214.5
  Bottom Layer w0.5: v1(70,188) 70,211.5 74,215.5 v1(79.5,215.5)
NetLD5_1: LD5.1 U2.2 | length 26.1
  Top Layer w0.6: U2.2 71.635,182.635 v1(72,183) ; v1(74.5,196) 77.73,196 LD5.1
  Bottom Layer w0.6: v1(72,183) 72,194 74,196 v1(74.5,196)
NetLD6_1: LD6.1 U2.3 | length 50.9
  Top Layer w0.6: U2.3 71.534,181.365 71.847,181.052 v1(71.901,181.052) ; v1(74.5,194.5) 76,194.5 80,190.5 85.62,190.5 85.62,194.62 87,196 96,196 96,195.98 98.73,193.25 LD6.1
  Bottom Layer w0.6: v1@72,181 73,181 73.5,181.5 73.5,193.5 v1(74.5,194.5)
NetLD7_1: LD7.1 U3.1 | length 90
  Top Layer w0.6: U3.1 71.905,158.905 v1(71.953,158.953) v1@72,159 ; v1(74.5,193) 78,189.5 85.893,189.5 86.52,190.127 86.52,193.52 87,194 93,194 96.5,190.5 102.62,190.5 102.62,192.62 104,194 114.98,194 115.73,193.25 LD7.1
  Bottom Layer w0.6: v1@72,159 74.5,161.5 v1(74.5,193)
NetLD8_1: LD8.1 U3.2 | length 46.3
  Top Layer w0.4: LD8.1 27.725,152.995
  Top Layer w0.6: 27.725,152.995 62.495,152.995 67.135,157.635 U3.2
NetLD9_1: LD9.1 U3.3 | length 119.9
  Top Layer w0.4: 145.5,150 145.715,150 145.817,149.898 146.863,149.898 146.965,150 148.255,150 148.357,149.898 149.403,149.898 149.505,150 150.5,150
  Top Layer w0.5: U3.3 70.135,156.365 72.5,154 v1(72.5,152) ; v1(75,152) 78,149 144.5,149 145.5,150 ; 150.5,150 152.5,150 153,150.5 179.23,150.5 LD9.1
  Bottom Layer w0.5: v1(72.5,152) v1(75,152)
NetLD10_1: LD10.1 U4.1 | length 63.3
  Top Layer w0.6: LD10.1@9,116.5 10.5,118 12.98,118 18.885,123.905 U4.1
NetLD11_1: LD11.1 U4.2 | length 30.9
  Top Layer w0.6: LD11.1 42.73,118.73 46.635,122.635 U4.2
NetLD12_1: LD12.1 U4.3 | length 42.3
  Top Layer w0.6: U4.3 71.135,121.365 72,120.5 72,119 74,117 81.5,117 83,118.5 103.5,118.5 106,116 LD12.1
NetR1_1: R1.1 U1.6 | length 83.9
  Top Layer w0.6: U1.6 74.86,203.5 v1(77.5,203.5) ; v1(78,145.5) 73.5,141 73.5,136.5 R1.1
  Bottom Layer w0.6: v1(77.5,203.5) 78,203 v1(78,145.5)
NetR2_1: R2.1 U1.8 U2.8 U3.8 U4.8 U5.8 | length 210.5
  Top Layer w0.6: U5.8 62,19.18 v1(62,21) ; U4.8 75.905,123.905 v1(76,124) ; U3.8 75.797,158.905 75.919,159.027 v1(75.973,159.027) ; U2.8 75.905,183.905 v1(76,184) ; U1.8 75,206.18 75,208 v1(76,209)
  Top Layer w1: v1(76,209) R2.1
  Bottom Layer w0.6: v1(62,21) 67,21 76,30 v1(76,124) v1@76,159 ; v1(75.973,159.027) v1@76,159 ; v1(76,209) 76,197.414 76,196.586 76,196.414 76,195.586 v1(76,184) v1@76,159
NetR3_1: R3.1 U2.6 | length 11.5
  Top Layer w0.6: R3.1 73.4,189.6 73.4,184.278 73.4,181.365 U2.6
NetR3_2: R3.2 U1.5 | length 10.3
  Top Layer w0.6: R3.2@72,192.943 72,199.37 U1.5
NetR4_1: R4.1 U3.6 | length 14.1
  Top Layer w0.6: R4.1 74,163 77,160 77,158.64 76.05,157.69 76.05,157.262 75.523,156.735 75.095,156.735 U3.6
NetR4_2: R4.2 U2.5 | length 10.4
  Top Layer w0.6: R4.2 74.725,170.725 U2.5
NetR5_1: R5.1 U4.6 | length 29.4
  Top Layer w0.6: R5.1 72,144 72,130 77,125 77,122 76.365,121.365 U4.6
NetR5_2: R5.2 U3.5 | length 7.4
  Top Layer w0.6: R5.2 74,154.37 U3.5
NetR6_1: R6.1 U5.6 | length 3.5
  Top Layer w0.6: U5.6 64.365,16.365 R6.1
NetR6_2: R6.2 U4.5 | length 105.4
  Top Layer w0.6: R6.2 v1(65,23) ; U4.5 75,119.82 v1(75,118)
  Bottom Layer w0.6: v1(65,23) 65,26 75,36 v1(75,118)
ROW0: D1.3 D2.3 D3.3 D4.3 D5.3 D6.3 D7.3 D8.3 D9.3 D10.3 D11.3 P3.6 | length 261.5
  Top Layer w0.4: 74.5,214 77,214
  Top Layer w0.6: D1.3 D2.3 D3.3 D4.3 74.5,214 ; 77,214 77.298,214 79.148,212.15 85,212.15 D5.3 94.324,214 96.174,212.15 101.961,212.15 103.42,213.609 103.42,213.77 103.65,214 D6.3 ; D6.3@103.864,214.014 107.986,214.014 109.85,212.15 118.961,212.15 120.42,213.609 120.42,213.77 120.65,214 D7.3 132.201,214 132.226,213.975 D8.3@133,213.975 ; D8.3 134,214 134.025,213.975 137.025,213.975 139,212 157.85,212 D9.3 v1(165,214) D10.3 D11.3 ; v1@166,171.48 P3.6
  Bottom Layer w0.6: v1(165,214) 166,213 v1(166,171.5)
ROW1: D12.3 D13.3 D14.3 D15.3 D16.3 D17.3 D18.3 D19.3 D20.3 D21.3 D22.3 P3.5 | length 219.6
  Top Layer w0.4: 70.5,192 73.5,192
  Top Layer w0.6: D12.3 D13.3 D14.3 D15.3 70.5,192 ; 73.5,192 77,188.5 86.166,188.5 87.85,190.184 87.85,191.975 87.675,191.975 87.65,192 91.038,192 94.038,189 102.393,189 104,190.607 D17.3 108.038,192 110.037,190 118,190 118.65,190.65 118.829,190.65 119.62,191.441 119.62,191.62 120,192 D18.3 D19.3 D20.3 D21.3 189.201,192 ; D22.3 195,192 201.5,185.5 201.5,172 200.98,171.48 P3.5
ROW2: D23.3 D24.3 D25.3 D26.3 D27.3 D28.3 D29.3 D30.3 D31.3 D32.3 D33.3 P3.8 | length 188.4
  Top Layer w0.3: 145,170 145.686,170 145.838,170.152 146.848,170.152 147,170 148.226,170 148.378,170.152 149.382,170.152 149.534,170 149.901,170
  Top Layer w0.4: 72,169 76,169
  Top Layer w0.6: D23.3 D24.3 D25.3 D26.3 72,169 ; 76,169 D27.3 104.201,169 104.226,169.025 105.774,169.025 105.799,169 D29.3 D30.3 144,169 145,170 ; 149.901,170 157.85,170 D31.3 D32.3 D33.3 192.91,168.94 194.341,168.94 194.376,168.975 195.924,168.975 195.959,168.94 P3.8
ROW3: D34.3 D35.3 D36.3 D37.3 D38.3 D39.3 D40.3 D41.3 D42.3 D43.3 D44.3 P3.7 | length 209.4
  Top Layer w0.3: 145,147 145.546,147 145.838,147.292 146.842,147.292 147.134,147 148.086,147 148.378,147.292 149.382,147.292 149.674,147 150,147
  Top Layer w0.6: D34.3 D35.3 48.201,147 48.226,147.025 49.774,147.025 49.799,147 D37.3 D38.3 D39.3 121.201,147 121.226,147.025 122.774,147.025 122.799,147 D41.3 145,147 ; 150,147 D42.3 D43.3 179,147 182,144 187,144 187.5,144.5 189.429,144.5 191.929,147 D44.3 192.85,148.85 v1(194.5,150.5)
  Bottom Layer w0.4: 196,167.5 196.455,167.5 196.617,167.662 197.663,167.662 197.825,167.5 198.5,167.5 199.68,168.68 P3.7
  Bottom Layer w0.6: v1(194.5,150.5) 194.5,155 195,155.5 195,166.5 196,167.5
ROW4: D45.3 D46.3 D47.3 D48.3 D49.3 D68.3 P2.9 P3.20 | length 452.6
  Top Layer w0.6: D68.3 6.65,89.35 5,91 5,105 12,112 D45.3 28.274,112 58.349,112 v1(83,112) D46.3 D47.3 102.899,112 112.162,112 D48.3 D49.3 140,112 148,104 148,69 152,65 194.5,65 203,73.5 203,144.5 v1(202.5,145)
  Bottom Layer w0.4: v1(83,112) 83,19.808 82.75,19.558 82.75,17.75 P2.9 ; P3.20 197.14,153.36 198,152.5 199.095,152.5 199.157,152.438 200.203,152.438 200.265,152.5 201,152.5 201.5,152
  Bottom Layer w0.6: 201.5,152 202.5,151 v1(202.5,145)
ROW5: D50.3 D51.3 D52.3 D53.3 D54.3 D67.3 P2.11 P3.19 | length 387.8
  Top Layer w0.6: D67.3@15.5,65.5 17,67 D50.3 47.85,68.85 51,72 63,72 v1(81,90) D51.3 102.7,90 104.201,90 104.226,89.975 105.774,89.975 105.799,90 119.7,90 121.201,90 121.226,90.025 122.774,90.025 122.799,90 D54.3 140,90 144.5,85.5 144.5,68 150.5,62 194.5,62 205,72.5 205,121.202 204.9,121.302 204.9,124.698 205,124.798 205,145 v1(204.5,145.5)
  Bottom Layer w0.4: v1(81,90) 78.5,87.5 78.5,54.5 78.5,33.5 80.17,31.83 80.17,18.32 80.87,17.62 80.87,17.09 P2.11
  Bottom Layer w0.6: P3.19 199.857,153.523 202.477,153.523 204.5,151.5 v1(204.5,145.5)
ROW6: D55.3 D56.3 D57.3 D58.3 D59.3 D60.3 D61.3 P2.8 P3.47 | length 297.4
  Top Layer w0.6: D55.3 35.95,56.05 39,53 49.85,53 D56.3 D57.3 63.85,60.85 70,67 D58.3 D59.3 121.201,67 121.226,67.025 122.774,67.025 122.799,67 D61.3 141,67 148.5,59.5 196,59.5 208,71.5 208,113.5 207.5,114
  Bottom Layer w0.6: P2.8 86.54,32.04 87.5,33 87.5,64.5 v1(90,67) ; P3.47 199.82,118 201,118 205,114 v1(207,114)
ROW7: D62.3 D63.3 D64.3 D65.3 D66.3 P2.10 P3.48 | length 260.3
  Top Layer w0.4: P2.10 84,29 89.5,34.5 89.5,45
  Top Layer w0.6: D62.3 61,30 76,45 D63.3 89.5,45 102.7,45 104.201,45 104.226,45.025 105.774,45.025 105.799,45 119.7,45 121.201,45 121.226,45.025 122.774,45.025 122.799,45 D66.3 185,45 210,70 210,115.5 v1(209.5,116)
  Bottom Layer w0.4: P3.48 198.5,119.5 199.075,119.5 199.157,119.418 201.582,119.418 205,116 v1(209.5,116)
VCC: P2.14 P3.1 P3.2 | length 280.9
  Bottom Layer w0.4: P2.14 78.92,18.58 80.17,17.33 80.17,16.022 80.5,15.692 80.5,13
  Bottom Layer w0.6: 80.5,13 82,11.5 98,11.5 106,19.5 158.5,19.5 211,72 211,117 210,118 207.5,118 202.5,123 202.5,138.5 207.5,143.5 207.5,168.74 P3.1 P3.2 P3.2@197.14,177.14
pads on no net: D1.2 D2.2 D3.2 D4.2 D5.2 D6.2 D7.2 D8.2 D9.2 D10.2 D11.2 D12.2 D13.2 D14.2 D15.2 D16.2 D17.2 D18.2 D19.2 D20.2 D21.2 D22.2 D23.2 D24.2 D25.2 D26.2 D27.2 D28.2 D29.2 D30.2 D31.2 D32.2 D33.2 D34.2 D35.2 D36.2 D37.2 D38.2 D39.2 D40.2 D41.2 D42.2 D43.2 D44.2 D45.2 D46.2 D47.2 D48.2 D49.2 D50.2 D51.2 D52.2 D53.2 D54.2 D55.2 D56.2 D57.2 D58.2 D59.2 D60.2 D61.2 D62.2 D63.2 D64.2 D65.2 D66.2 D67.2 D68.2 E1. P1.1 P1.2 P1.6 P1.7 P1.8 P2.4 P2.5 P2.12 P2.16 P3.3 P3.4 P3.9 P3.10 P3.11 P3.12 P3.13 P3.14 P3.15 P3.16 P3.17 P3.18 P3.21 P3.22 P3.23 P3.24 P3.25 P3.26 P3.27 P3.28 P3.29 P3.30 P3.31 P3.32 P3.33 P3.34 P3.35 P3.36 P3.37 P3.38 P3.39 P3.40 P3.53 P3.54 P3.55 P3.56 P3.57 P3.58 P3.59 P3.60 P3.61 P3.62 P3.63 P3.64 P3.65 P3.66 P3.67 P3.68 P3.69 P3.70 P3.71 P3.72 P3.73 P3.74 P3.76 P3.83 P3.85 P3.86 P3.87 P3.88 P3.89 P3.90 P3.91 P3.92 P3.93 P3.94 P3.95 P3.96 P3.98 U1.7 U2.7 U3.7 U4.7 U5.3 U5.5 U5.7

## Polygon pours and split planes (outlines as drawn)
GND on Bottom Layer "GND_L02_P000" (solid, remove dead copper, pour order 0): -2.5,235.5 -1.5,236.5 216.5,236.5 216.5,-5 216,-5.5 -1.5,-5.5
GND on Top Layer "GND_L01_P001" (solid, remove dead copper, pour order 1): -2,236 -1,235 217.5,235 217.5,-1.5 216,-3 -2.5,-3

## Silkscreen, mask and mechanical layers (free items; w line width, h text height)
Top Overlay:
  text "Vini's Lab" at 146.514,28.153 h15
Mechanical 1:
  the board outline again, w0.2

## Text inside footprints (layer, text, board x,y; h text height)
P2: Bottom Overlay "2" at 96.7,18.532 h1.27; Bottom Overlay "1" at 96.7,15.992 h1.27; Bottom Overlay "15" at 75.091,15.992 h1.27; Bottom Overlay "16" at 75.068,18.532 h1.27